# EAGLE board 4DEC (EAGLE 9.4.2)
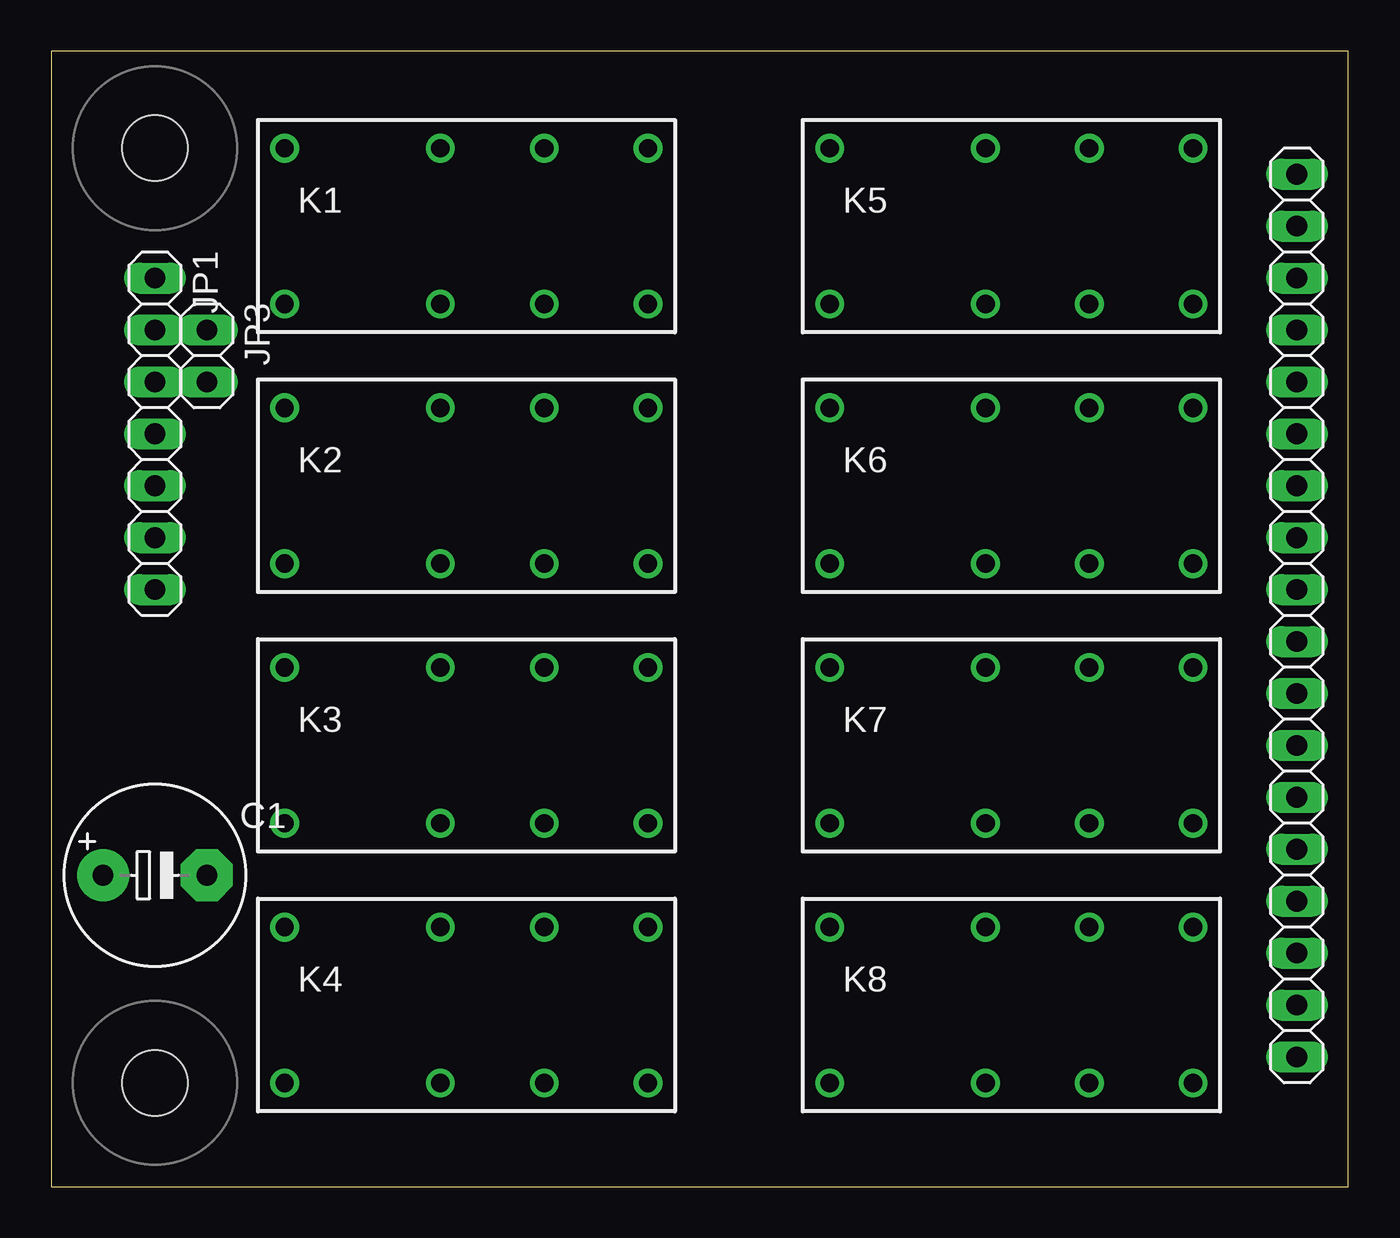
[diagram p0: board, top side]
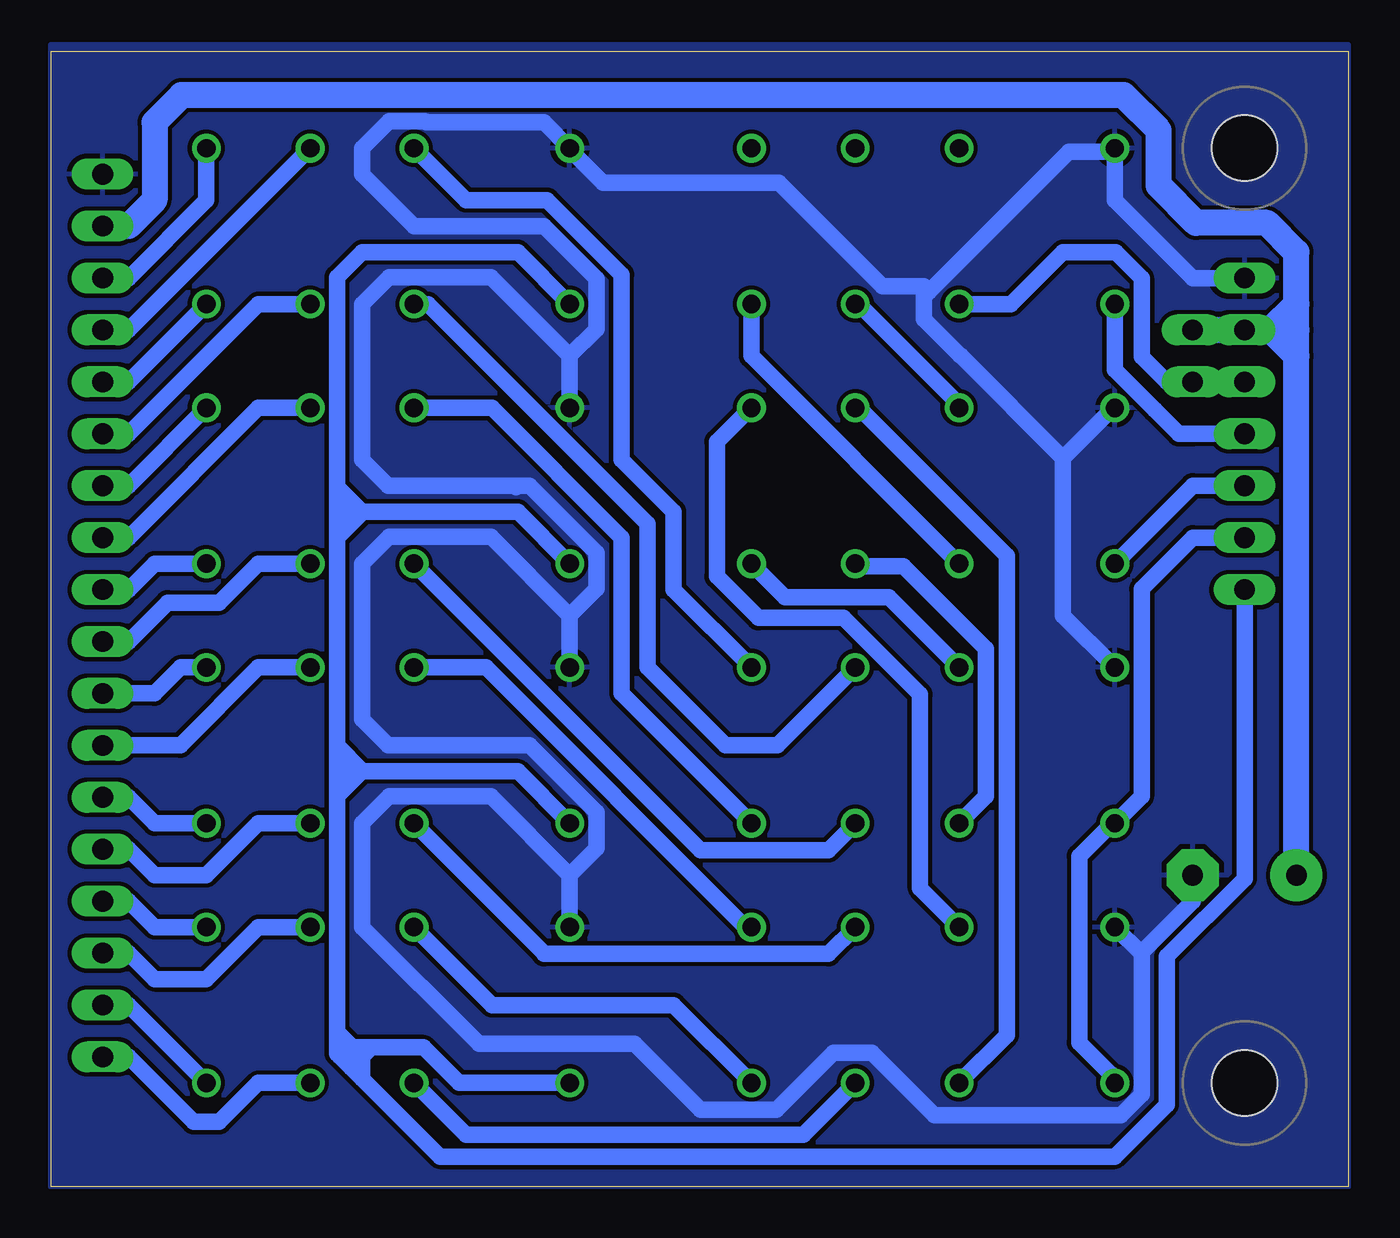
[diagram p1: board, bottom side, seen from below]

Size 63.48 x 55.55 mm. Coordinates in mm from the lower left corner, seen from the top.
Outline: 0,0 63.48,0 63.48,55.55 0,55.55 0,0
Copper layers (1*16): Top 0.0356mm / dielectric 1.5011mm / Bottom 0.0356mm
Design rules "formitaminimum": minimum track width 5mil, minimum drill 0.5994mm, track to track 0.2007mm, track to pad 0.2007mm, pad to pad 0.2007mm, via to via 0.2007mm, smd to smd 0mil, copper to edge 0mil, drill to drill 1mil, minimum pad ring 10mil, minimum via ring 8mil, stop-mask expansion 4mil, vias tented up to drill 1mm, thermal gap 10mil
Net classes: 0 default: width 0.406 mm

## Footprints (pad centres in the part's own frame; a part is rotated, then mirrored left to right if it is on the bottom)
E5-8,5 = drill 1.016 pad 2.54: + -2.54,0 | drill 1.016 pad 2.54 octagon: - 2.54,0
1X07 = drill 1.016 long: 1 -7.62,0; 2 -5.08,0; 3 -2.54,0; 4 0,0; 5 2.54,0; 6 5.08,0; 7 7.62,0
1X18 = drill 1.016 long: 1 -21.59,0; 2 -19.05,0; 3 -16.51,0; 4 -13.97,0; 5 -11.43,0; 6 -8.89,0; 7 -6.35,0; 8 -3.81,0; 9 -1.27,0; 10 1.27,0; 11 3.81,0; 12 6.35,0; 13 8.89,0; 14 11.43,0; 15 13.97,0; 16 16.51,0; 17 19.05,0; 18 21.59,0
1X02 = drill 1.016 long: 1 -1.27,0; 2 1.27,0
DS-BT = drill 0.9: 1 -8.89,-3.81; 4 -1.27,-3.81; 6 3.81,-3.81; 8 8.89,-3.81; 9 8.89,3.81; 11 3.81,3.81; 13 -1.27,3.81; 16 -8.89,3.81
HOLE_3.2 = hole 3.2: 0,0

## Placement (x,y rotation side)
C1  [E5-8,5]  5.08,15.24 0 top
JP1  [1X07]  5.08,36.83 270 top
JP2  [1X18]  60.96,27.94 270 top
JP3  [1X02]  7.62,40.64 270 top
K1  RELAY5V  [DS-BT]  20.32,46.99 0 top
K2  RELAY5V  [DS-BT]  20.32,34.29 0 top
K3  RELAY5V  [DS-BT]  20.32,21.59 0 top
K4  RELAY5V  [DS-BT]  20.32,8.89 0 top
K5  RELAY5V  [DS-BT]  46.99,46.99 0 top
K6  RELAY5V  [DS-BT]  46.99,34.29 0 top
K7  RELAY5V  [DS-BT]  46.99,21.59 0 top
K8  RELAY5V  [DS-BT]  46.99,8.89 0 top
U$1  [HOLE_3.2]  5.08,5.08 0 top
U$2  [HOLE_3.2]  5.08,50.8 0 top

## Library data of the parts
C1 = Passive_Robotech
JP1-JP3 = pinhead
K1-K8 = My
U$1 U$2 = Document_Robotech

## Nets
+5V: C1.+ JP1.2 JP2.2 JP3.1
GND: C1.- JP1.1 JP2.1 K1.16 K2.16 K3.16 K4.16 K5.16 K6.16 K7.16 K8.16
N$1: K1.8 K2.4
N$2: K1.6 K2.13
N$3: K2.8 K3.13
N$4: K2.6 K3.4
N$5: K2.9 K4.13
N$6: K2.11 K4.4
N$7: K3.9 K5.13
N$8: K3.11 K5.4
N$9: K3.8 K6.13
N$10: K3.6 K6.4
N$11: K4.9 K7.13
N$12: K4.11 K7.4
N$13: K4.8 K8.13
N$14: K4.6 K8.4
N$15: JP2.3 K5.9
N$16: JP1.6 K3.1 K4.1
N$17: JP1.7 K5.1 K6.1 K7.1 K8.1
N$18: JP2.4 K5.11
N$19: JP1.4 K1.1
N$20: JP1.5 K2.1
N$21: JP2.5 K5.8
N$22: JP2.6 K5.6
N$23: JP2.7 K6.9
N$24: JP2.8 K6.11
N$25: JP2.9 K6.8
N$26: JP2.10 K6.6
N$27: JP2.11 K7.9
N$28: JP2.12 K7.11
N$29: JP2.13 K7.8
N$30: JP2.14 K7.6
N$31: JP2.15 K8.9
N$32: JP2.16 K8.11
N$33: JP2.17 K8.8
N$34: JP2.18 K8.6
N$35: JP1.3 JP3.2 K1.4

## Tracks (layer width: path | path; a pad name or v marks a point on that pad's centre or on a via)
+5V
  Bottom 1.27: JP3.1 JP1.2 | JP1.2 2.54,41.91 | C1.+ 2.54,40.64 | 2.54,40.64 2.54,41.91 | 2.54,41.91 2.54,43.18 | 3.81,41.91 2.54,43.18 | JP1.2 3.81,41.91 | 3.81,41.91 2.54,40.64 | JP2.2 59.69,46.99 58.42,48.26 58.42,52.07 57.1,53.39 11,53.39 9.28,51.68 9.28,48.98 7.46,47.15 3.97,47.15 2.54,45.72 2.54,43.18
GND
  Bottom 0.813: K6.16 38.1,40.64 | 38.1,40.64 36.79,41.95 36.79,44.41 39.37,46.99 45.72,46.99 48.26,49.53 48.26,50.63 48.26,50.8 46.95,52.11 45.18,52.11 45.14,52.07 39.37,52.07 K5.16 38,50.63 36.48,49.11 27.86,49.11 22.8,44.04 20.77,44.04 | 38.1,40.64 41.95,44.49 46.95,44.49 48.26,43.18 48.26,35.56 46.99,34.29 40.8,34.29 | 40.72,34.21 40.8,34.29 | 40.8,34.29 40.06,34.29 36.79,31.02 36.79,29.25 38.1,27.94 | K7.16 38.1,27.94 | 38.1,27.94 41.95,31.79 46.95,31.79 48.26,30.48 48.26,22.86 46.99,21.59 40.06,21.59 36.79,18.32 36.79,16.55 38.1,15.24 | K8.16 38.1,15.24 | 38.1,15.24 41.95,19.09 46.95,19.09 48.26,17.78 48.26,12.7 42.55,6.99 34.92,6.99 31.71,3.77 27.98,3.77 25.21,6.54 23.3,6.54 20.26,3.5 11.14,3.5 10.12,4.53 10.12,11.39 | 13.97,35.64 11.65,37.96 K2.16 | 20.52,43.79 20.77,43.54 20.77,43.03 | 20.52,43.79 13.68,50.63 11.65,50.63 K1.16 11.43,48.26 7.62,44.45 JP1.1 | 20.77,44.04 20.52,43.79 | K4.16 10.12,11.39 | K3.16 13.97,27.94 13.97,35.64 | 13.97,35.64 18.97,40.64 | 19.01,40.68 20.77,42.44 20.77,44.04 | C1.- 7.62,13.97 10.12,11.47 10.12,11.39
  pour Bottom: 0,0 63.5,0 63.5,55.88 0,55.88
N$1
  Bottom 0.813: K2.4 29.21,40.64 K1.8
N$2
  Bottom 0.813: K2.13 19.25,38.47 23.81,43.03 K1.6
N$3
  Bottom 0.813: K3.13 22.49,28.84 27.57,28.84 K2.8
N$4
  Bottom 0.813: K2.6 23.81,30.36 21.78,30.36 17.73,26.31 17.73,19.1 K3.4
N$5
  Bottom 0.813: K2.9 29.39,37.96 30.91,36.44 30.91,29.86 28.88,27.83 24.7,27.83 20.95,24.08 20.95,14.61 K4.13
N$6
  Bottom 0.813: K2.11 23.81,37.96 16.72,30.87 16.72,7.41 K4.4
N$7
  Bottom 0.813: K5.13 43.18,48.26 39.21,48.26 35.56,44.61 35.56,35.56 33.02,33.02 33.02,29.21 K3.9
N$8
  Bottom 0.813: K5.4 45.03,43.18 34.29,32.44 34.29,25.4 30.48,21.59 27.94,21.59 K3.11
N$9
  Bottom 0.813: K6.13 41.91,38.1 35.56,31.75 35.56,24.13 K3.8
N$10
  Bottom 0.813: K3.6 25.44,16.47 31.71,16.47 K6.4
N$11
  Bottom 0.813: K4.9 29.5,12.7 42.2,25.4 K7.13
N$12
  Bottom 0.813: K4.11 25.44,11.39 39.37,11.39 39.37,11.43 K7.4
N$13
  Bottom 0.813: K8.13 41.91,8.89 33.02,8.89 K4.8
N$14
  Bottom 0.813: K8.4 43.18,2.54 26.67,2.54 K4.6
N$15
  Bottom 0.813: JP2.3 59.69,44.45 55.88,48.26 K5.9
N$16
  Bottom 0.813: K4.1 11.65,5.53 13.17,7.05 13.17,16.17 11.65,17.69 K3.1 10.12,19.09 10.12,29.25 7.62,31.75 JP1.6
N$17
  Bottom 0.813: 49.49,19.09 49.49,20.32 | 49.49,20.32 49.49,21.59 | 49.49,21.59 49.49,31.75 | 49.49,31.75 49.49,33.02 | 49.49,33.02 49.49,34.25 | 49.49,34.25 49.49,44.49 48.26,45.72 40.64,45.72 K5.1 | K6.1 40.64,33.02 48.26,33.02 | 49.49,33.02 48.26,33.02 | 48.26,20.32 49.49,20.32 | 48.26,20.32 49.49,19.09 | 48.26,20.32 48.26,20.36 49.49,21.59 | 48.26,33.02 49.49,34.25 | 48.26,33.02 48.26,32.98 49.49,31.75 | K7.1 40.64,20.32 48.26,20.32 | 49.49,7.58 49.49,6.51 49.37,6.39 | 49.49,7.58 49.49,19.09 | K8.1 43.51,5.08 45.25,6.82 47.79,6.82 | 49.37,6.39 48.79,5.82 | 47.79,6.82 48.26,6.82 | 48.26,6.82 48.93,6.82 49.37,6.39 | 47.79,6.82 48.26,6.35 | 48.26,6.35 48.79,5.82 | 48.79,5.82 48.26,5.29 | 48.26,5.29 44.45,1.48 11.43,1.48 8.89,4.02 8.89,11.27 5.08,15.08 JP1.7 | 48.26,6.82 48.26,6.35 | 48.26,6.35 48.26,5.29 | 48.26,6.35 49.49,7.58
N$18
  Bottom 0.813: JP2.4 59.69,41.91 K5.11
N$19
  Bottom 0.813: K1.1 11.43,39.95 9.48,38 8.31,36.83 7.62,36.83 JP1.4
N$20
  Bottom 0.813: K2.1 7.62,34.29 JP1.5
N$21
  Bottom 0.813: K5.8 59.69,39.37 JP2.5
N$22
  Bottom 0.813: K5.6 53.34,43.18 59.69,36.83 JP2.6
N$23
  Bottom 0.813: K6.9 59.69,34.29 JP2.7
N$24
  Bottom 0.813: K6.11 53.34,38.1 59.69,31.75 JP2.8
N$25
  Bottom 0.813: K6.8 58.42,30.48 59.69,29.21 JP2.9
N$26
  Bottom 0.813: K6.6 53.34,30.48 55.24,28.57 57.78,28.57 59.69,26.67 JP2.10
N$27
  Bottom 0.813: K7.9 57.15,25.4 58.42,24.13 JP2.11
N$28
  Bottom 0.813: K7.11 53.34,25.4 57.15,21.59 JP2.12
N$29
  Bottom 0.813: K7.8 58.42,17.78 59.69,19.05 JP2.13
N$30
  Bottom 0.813: K7.6 53.34,17.78 55.88,15.24 58.42,15.24 59.69,16.51 JP2.14
N$31
  Bottom 0.813: JP2.15 59.69,13.97 58.42,12.7 K8.9
N$32
  Bottom 0.813: K8.11 53.34,12.7 55.88,10.16 58.42,10.16 59.69,11.43 JP2.16
N$33
  Bottom 0.813: K8.8 59.69,8.89 JP2.17
N$34
  Bottom 0.813: K8.6 53.34,5.08 55.24,3.17 56.52,3.17 59.69,6.35 JP2.18
N$35
  Bottom 0.813: K1.4 16.51,43.18 13.97,45.72 11.39,45.72 10.12,44.45 10.12,40.6 8.89,39.37 JP3.2 JP1.3